# Altium PCB Cat_PCB.PcbDoc
Units mil, origin at the board's own origin, x right, y up, seen from the top; angles counter-clockwise.
Board outline 3550 x 3650 mil, 2 copper layers (Top Layer, Bottom Layer); 21 components, 21 nets, 89 pads, 14 vias.
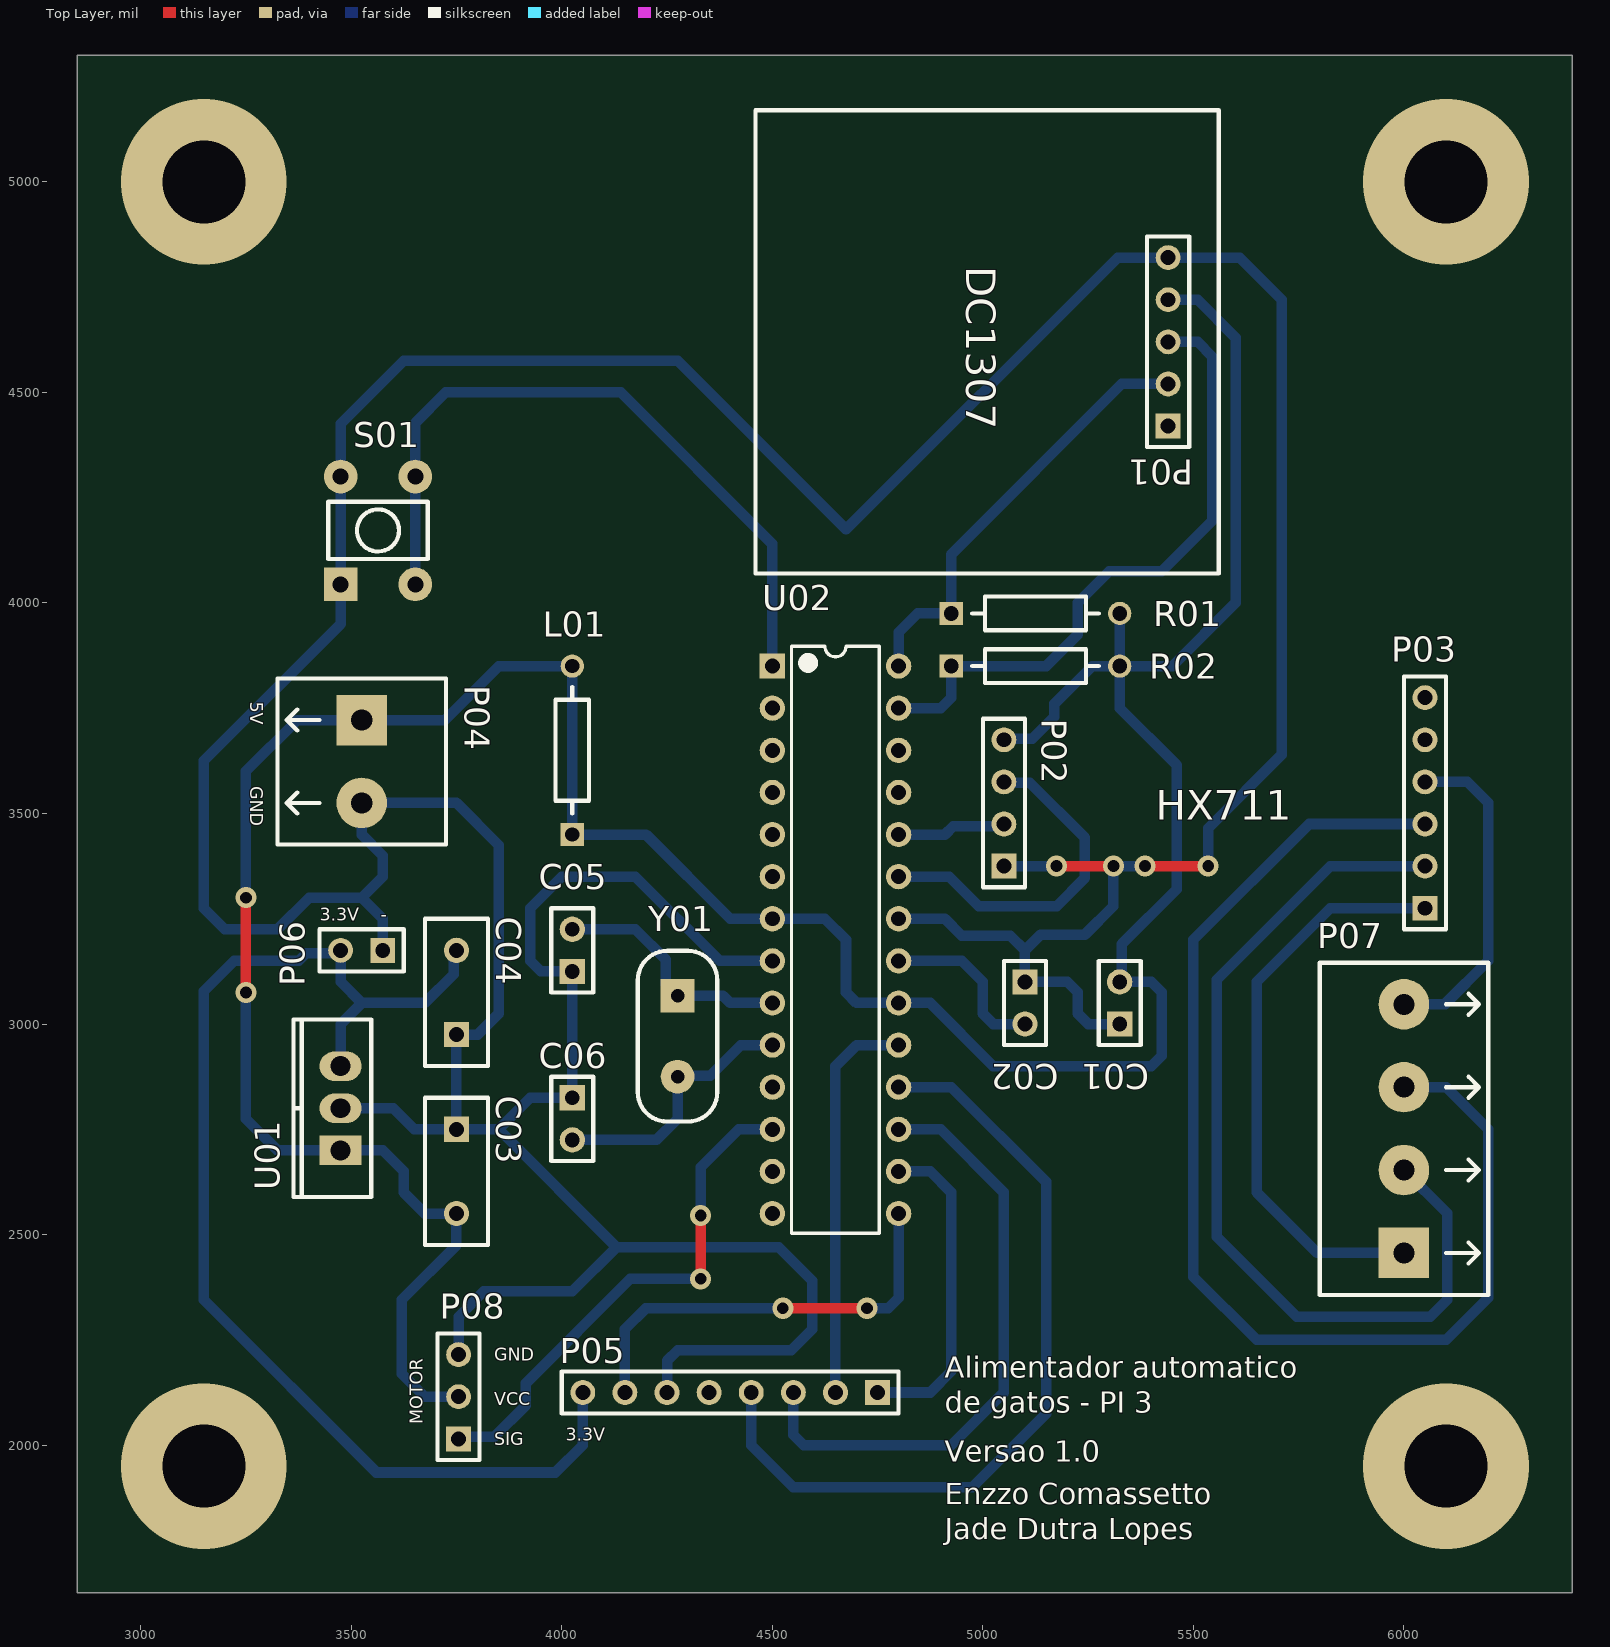
[diagram p0: Top Layer view]
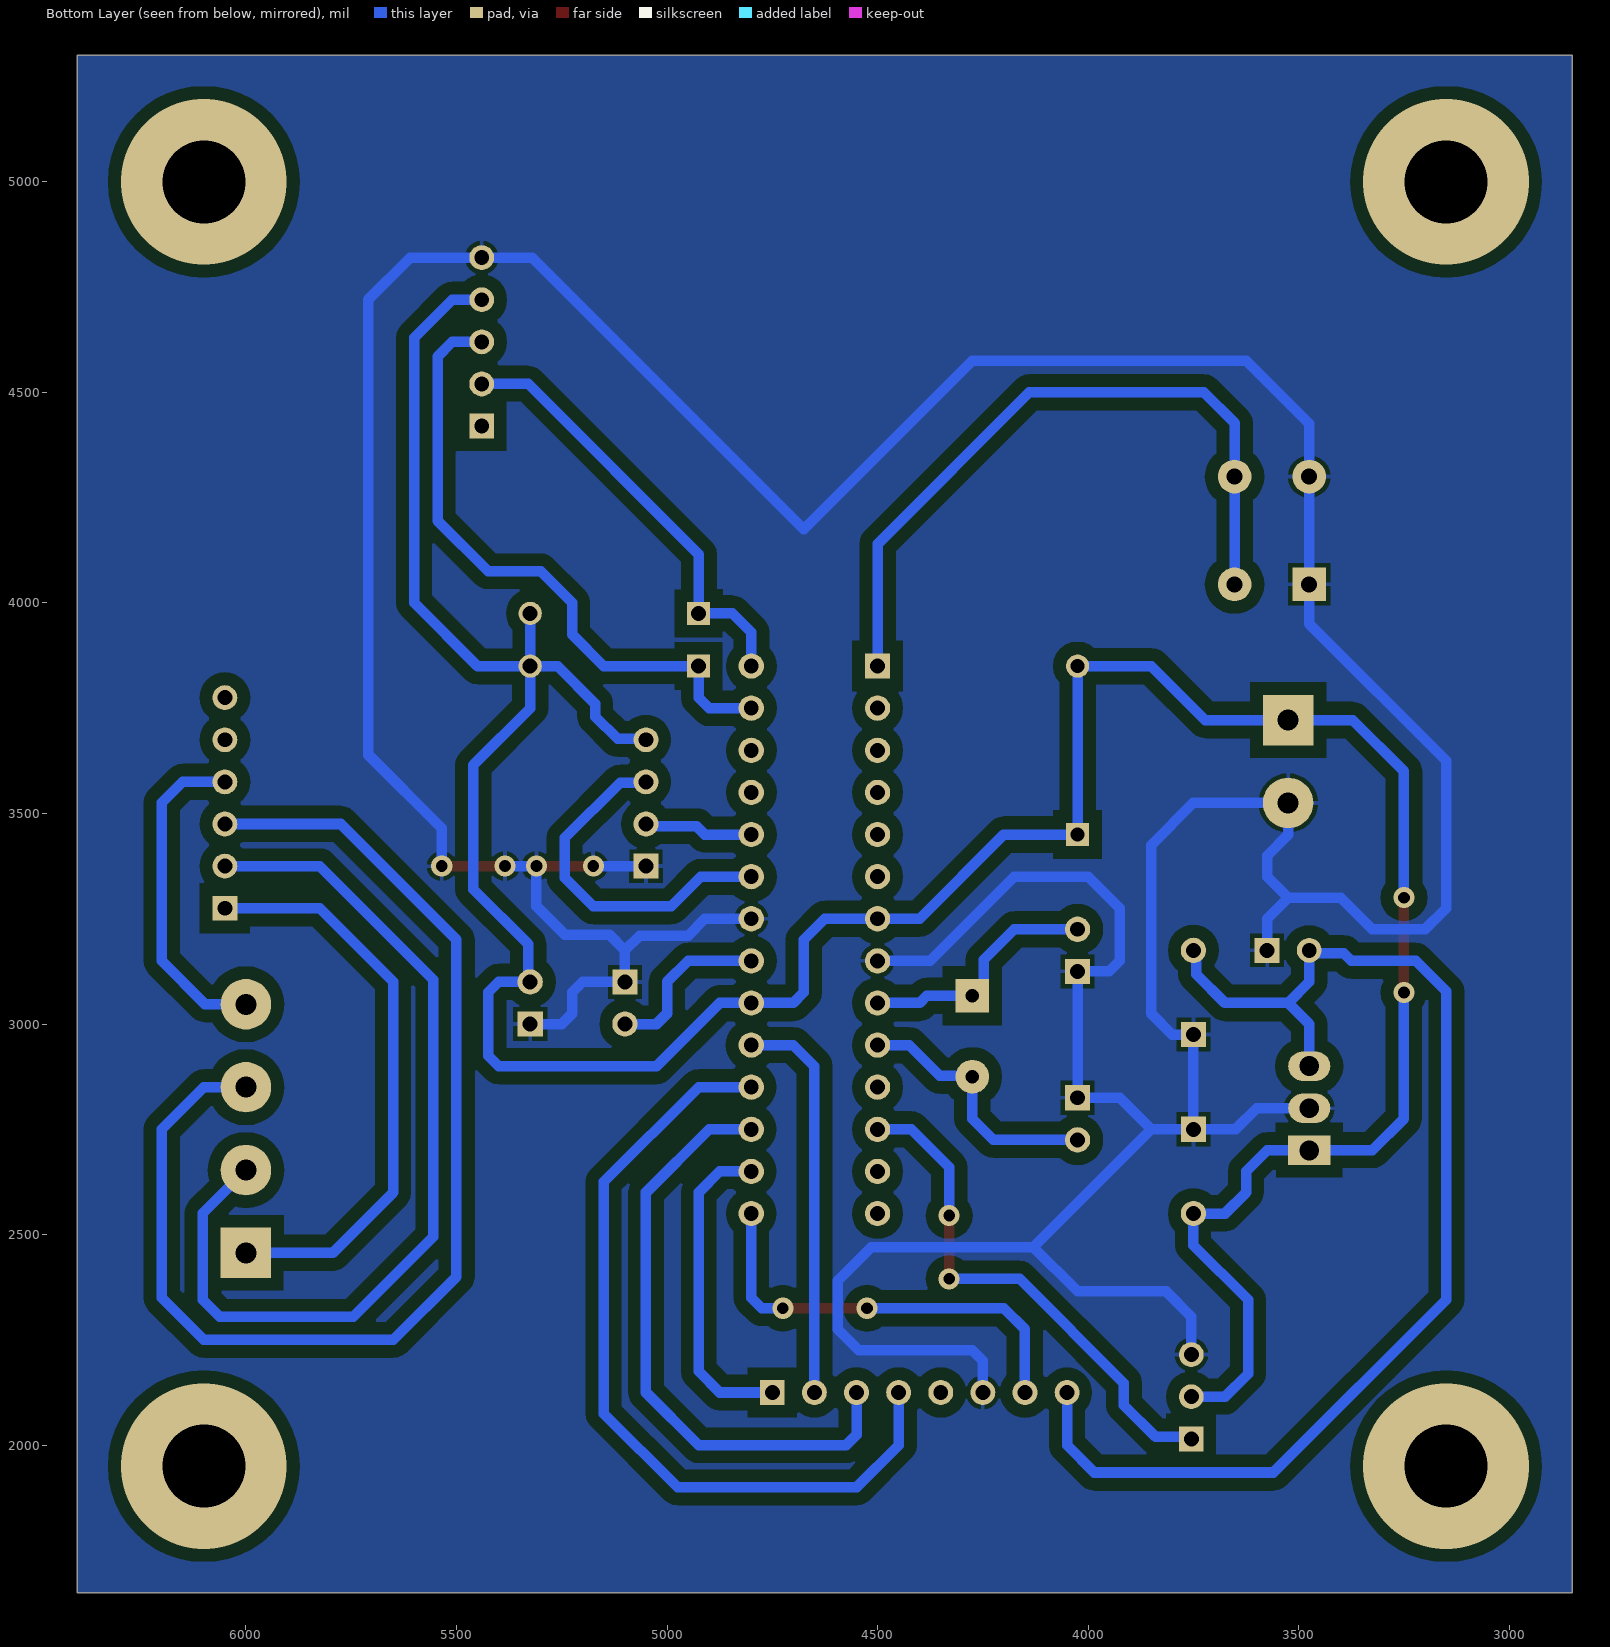
[diagram p1: Bottom Layer view, seen from below]
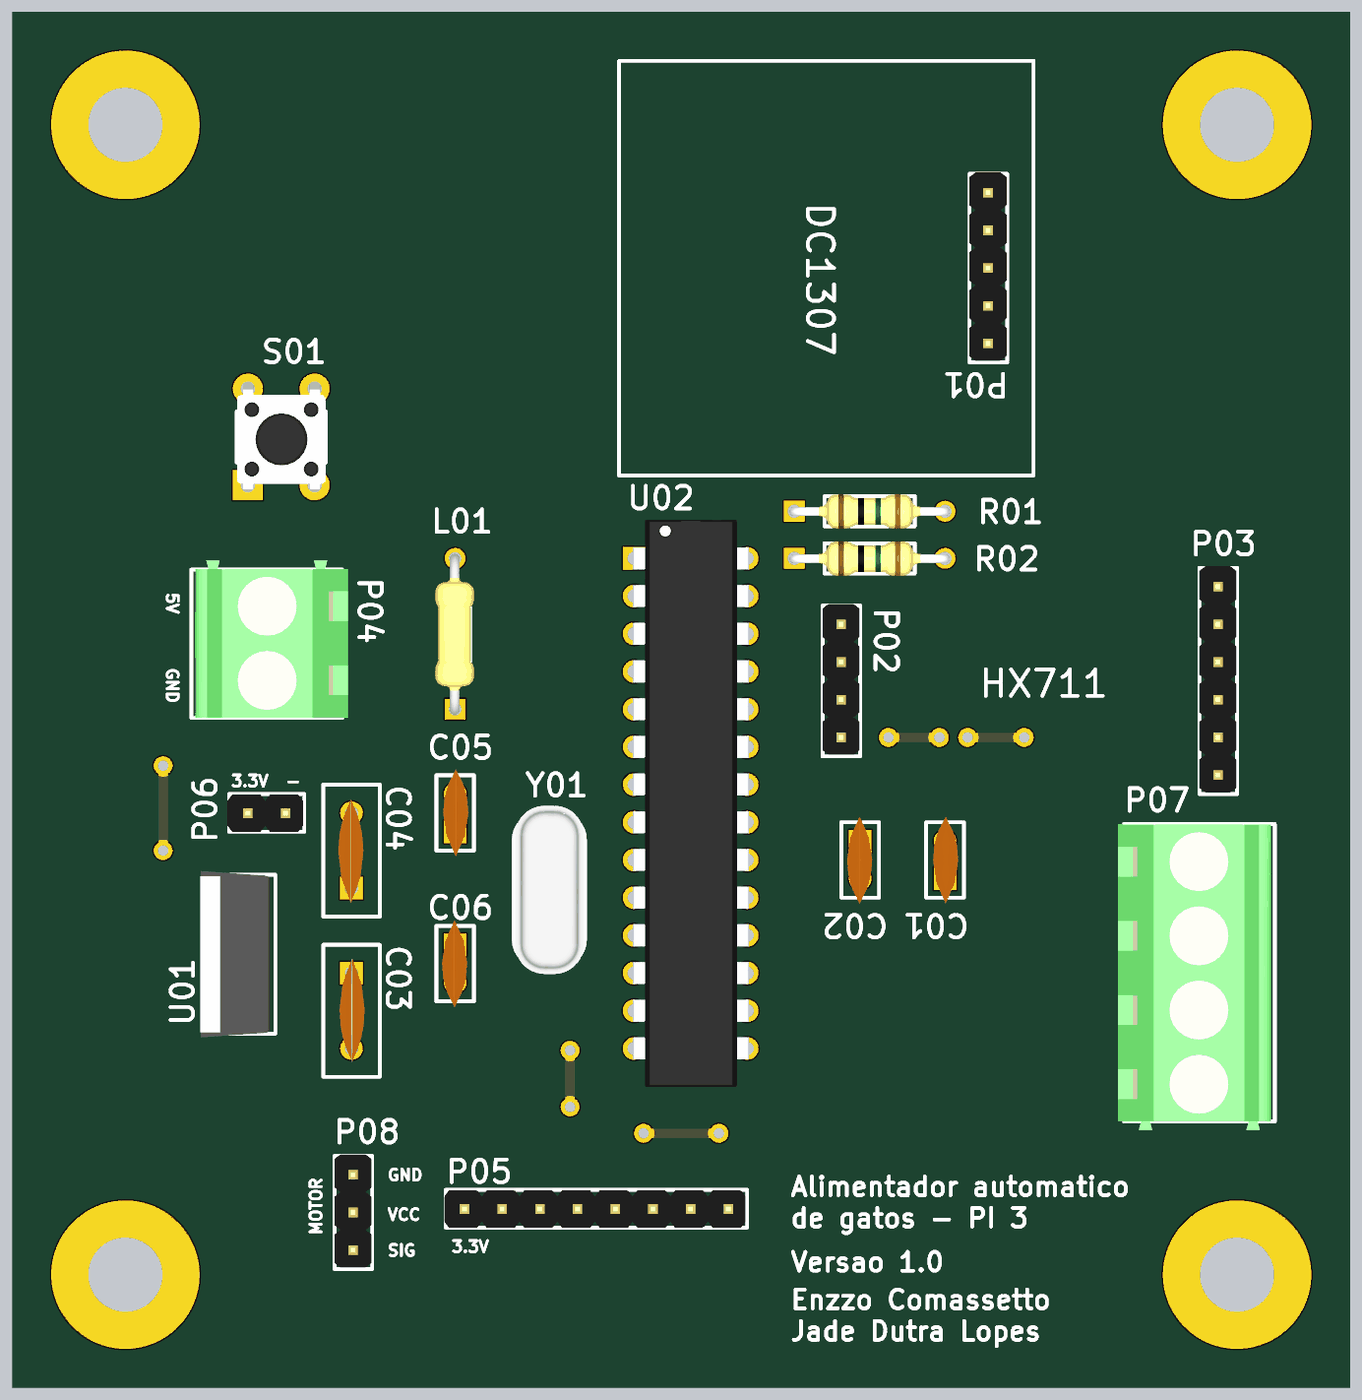
[diagram p2: 3D render of the assembled board from above, using the file's embedded part models]

## Layer stack, top to bottom
Top Solder: solder mask 0.4, Solder Resist, Dk 3.5
Top Layer: signal copper 1.4
Dielectric 1: dielectric 12.6, FR-4, Dk 4.8
Bottom Layer: signal copper 1.4
Bottom Solder: solder mask 0.4, Solder Resist, Dk 3.5

## Board outline
2850,1650 2850,5300 6400,5300 6400,1650 6000,1650

## Design rules (kind name [scope] priority, off if disabled: settings)
Clearance [All] p1: gap=30 ignorepadtopadclearanceinfootprint=FALSE
ComponentClearance [All] p1: gap=10 collisioncheckmode=3 verticalgap=0 showdistances=FALSE
HoleSize [All] p1: absolutevalues=TRUE maxlimit=280 minlimit=1 maxpercent=80.000 minpercent=20.000
HoleToHoleClearance [All] p1: gap=5 allowstackedmicrovias=TRUE
MinimumSolderMaskSliver [All] p1: minsoldermaskwidth=5
PlaneClearance [All] p1: clearance=30
PolygonConnect [All] p1: connectstyle=Relief reliefconductorwidth=10 reliefentries=4 polygonreliefangle="90 Angle" airgapwidth=10
RoutingVias [All] p1: holewidth=28 width=50 viastyle="Through Hole" minholewidth=28 minwidth=50 maxholewidth=280 maxwidth=500
SilkToSilkClearance [All] p1: silktosilkclearance=4
SilkToSolderMaskClearance [IsPad] p1: minsilkscreentomaskgap=5 clearancetoexposedcopper=TRUE
SolderMaskExpansion [All] p1: expansion=4 istentingtop=FALSE
Width [All] p1: maxlimit=60 minlimit=25 preferedwidth=25
23 further rules are at their usual default settings.

## Components (designator, comment, footprint, x,y, rotation, side; value= is the part's Value field where it differs from the comment)
C01 "100nF" C100-200-100 5325,3000 r90 top
C02 "470nF" C100-200-100 5100,3100 r270 top
C03 "0.33uF" C200-350-150 3750,2750 r270 top
C04 "0.1uF" C200-350-150 3750,2975 r90 top
C05 "22pF" C100-200-100 4025,3125 r90 top
C06 "22pF" C100-200-100 4025,2825 r270 top
L01 "10uH" L400-2.0mm 4025,3450 r90 top
P01 "DS1307" HDR-M-1x5-2.54mm-180-9.2mm 5440,4420 r90 top
P02 "HX_IN" HDR-M-1x4-2.54mm-180-21.1mm 5050,3375 r90 top
P03 "HX_OUT" HDR-M-1x6-2.54mm-180-9.2mm 6050,3275 r90 top
P04 "5V" KRE_2 3525,3721.85 r270 top
P05 "RFID" HDR-M-1x8-2.54mm-180-9.2mm 4750,2125 r180 top
P06 "3.3V" HDR-M-1x2-2.54mm-180-9.2mm 3575,3175 r180 top
P07 "HX_OUT" KRE_4 6000,2456.3 r90 top
P08 "Motor" HDR-M-1x3-2.54mm-180-9.2mm 3755,2015 r90 top
R01 "10k" R400-2.0mm 4925,3975 r0 top
R02 "10k" R400-2.0mm 4925,3850 r0 top
S01 "PushButton" DTS-6.0mm-6.0mm-THT 3475,4044.09 r180 top
U01 "LM7833" TO-220/123 3475,2700 r90 top
U02 "ATmega328PA-PU" DIP28-300(100) 4500,3850 r270 top
Y01 "16MHz" HC49-US-THT 4275,2971.06 r270 top

## Footprints (in the part's own frame and the unit in brackets; to place one, negate y for a bottom-side part, rotate by r counter-clockwise, add the part's x,y. Pads: shape width x height; smd on the part's side, far side on the other; paste and mask are expansions set on the pad)
C100-200-100 [mil] "Radial Cap, Thru-Hole; 2 Leads; 0.1 in Pin Spacing"
  rect 60x60 hole 35.43: 1(0,0)
  round 60 hole 35.43: 2(100,0)
  silkscreen extent -50,-50 150,50, body extent -65,-35 165,32, height 245
C200-350-150 [mil] "Radial Cap, Thru-Hole; 2 Leads; 0.2 in Pin Spacing"
  rect 60x60 hole 35.43: 1(0,0)
  round 60 hole 35.43: 2(200,0)
  silkscreen extent -75,-75 275,75, body extent -40,-32 236,35, height 288
DIP28-300(100) [mil] "DIP, 28-Leads, Row Spacing 7.62mm, Pitch 2.54mm, Body 34.67x7.3mm"
  rect 60x60 hole 35.43: 1(0,0)
  round 60 hole 35.43: 2(100,0) 3(200,0) 4(300,0) 5(400,0) 6(500,0) 7(600,0) 8(700,0) 9(800,0) 10(900,0) 11(1000,0) 12(1100,0) 13(1200,0) 14(1300,0) 15(1300,300) 16(1200,300) 17(1100,300) 18(1000,300) 19(900,300) 20(800,300) 21(700,300) 22(600,300) 23(500,300) 24(400,300) 25(300,300) 26(200,300) 27(100,300) 28(0,300)
  silkscreen extent -47,46 1347,254, body extent -102,-4 1402,305, height 171
DTS-6.0mm-6.0mm-THT [mil] "Push Button Switch Through Role 6.0mm x 6.0mm"
  rect 80x80 hole 38: 1(0,0)
  round 80 hole 38: 2(0,-255.91) 3(-177.17,0) 4(-177.17,-255.91)
  silkscreen extent -207,-196 30,-60, body extent -207,-275 29,32, height 197
HC49-US-THT [mil] "THT Quartz Crystal"
  rect 80x80 hole 32: 1(-96.06,0)
  round 80 hole 32: 2(96.06,0)
  silkscreen extent -203,-94 203,94, body extent -223,-91 224,92, height 138
HDR-M-1x2-2.54mm-180-9.2mm [mm] "Male Header, 1 line 2 rows, 180 degrees, 9.2 mm length"
  rect 1.5x1.5 hole 0.9: 1(0,0)
  round 1.5 hole 0.9: 2(2.54,0)
  silkscreen extent -1.27,-1.27 3.81,1.27, body extent -1.17,-1.22 3.91,1.27, height 6.2
HDR-M-1x3-2.54mm-180-9.2mm [mm] "Male Header, 1 line 3 rows, 180 degrees, 9.2 mm length"
  rect 1.5x1.5 hole 0.9: 1(0,0)
  round 1.5 hole 0.9: 2(2.54,0) 3(5.08,0)
  silkscreen extent -1.27,-1.27 6.35,1.27, body extent -1.17,-1.22 6.45,1.27, height 6.2
HDR-M-1x4-2.54mm-180-21.1mm [mm] "Male Header, 1 line 4 rows, 180 degrees, 21.1 mm length"
  rect 1.5x1.5 hole 0.9: 1(0,0)
  round 1.5 hole 0.9: 2(2.54,0) 3(5.08,0) 4(7.62,0)
  silkscreen extent -1.27,-1.27 8.89,1.27, body extent -1.17,-1.22 8.99,1.27, height 15.14
HDR-M-1x5-2.54mm-180-9.2mm [mm] "Male Header, 1 line 5 rows, 180 degrees, 9.2 mm length"
  rect 1.5x1.5 hole 0.9: 1(0,0)
  round 1.5 hole 0.9: 2(2.54,0) 3(5.08,0) 4(7.62,0) 5(10.16,0)
  silkscreen extent -1.27,-1.27 11.43,1.27, body extent -1.17,-1.22 11.53,1.27, height 6.2
HDR-M-1x6-2.54mm-180-9.2mm [mm] "Male Header, 1 line 6 rows, 180 degrees, 9.2 mm length"
  rect 1.5x1.5 hole 0.9: 1(0,0)
  round 1.5 hole 0.9: 2(2.54,0) 3(5.08,0) 4(7.62,0) 5(10.16,0) 6(12.7,0)
  silkscreen extent -1.27,-1.27 13.97,1.27, body extent -1.17,-1.22 14.07,1.27, height 6.2
HDR-M-1x8-2.54mm-180-9.2mm [mm] "Male Header, 1 line 8 rows, 180 degrees, 9.2 mm length"
  rect 1.5x1.5 hole 0.9: 1(0,0)
  round 1.5 hole 0.9: 2(2.54,0) 3(5.08,0) 4(7.62,0) 5(10.16,0) 6(12.7,0) 7(15.24,0) 8(17.78,0)
  silkscreen extent -1.27,-1.27 19.05,1.27, body extent -1.17,-1.22 19.15,1.27, height 6.2
KRE_2 [mil] "Terminal Block 2 pins"
  rect 120x120 hole 50: 1(0,0)
  round 120 hole 50: 2(196.85,0)
  silkscreen extent -98,-200 295,200, body extent -123,-190 294,216, height 559
KRE_4 [mil] "Terminal Block 4 pins"
  rect 120x120 hole 50: 1(0,0)
  round 120 hole 50: 2(196.85,0) 3(393.7,0) 4(590.55,0)
  silkscreen extent -100,-200 689,200, body extent -123,-190 688,216, height 559
L400-2.0mm [mm] "Axial Device, Thru-Hole; 2 Leads; 0.4 in Pin Spacing"
  rect 1.4x1.4 hole 0.85: 1(0,0)
  round 1.4 hole 0.85: 2(10.16,0)
  silkscreen extent 1.27,-1.02 8.89,1.02, body extent -0.36,-1.27 10.46,1.33, height 3.5
R400-2.0mm [mm] "Axial Device, Thru-Hole; 2 Leads; 0.4 in Pin Spacing"
  rect 1.4x1.4 hole 0.9: 1(0,0)
  round 1.4 hole 0.9: 2(10.16,0)
  silkscreen extent 1.27,-1.02 8.89,1.02, body extent -0.3,-1.17 10.46,1.14, height 2.93
TO-220/123 [mil] "TO, Thru-Hole, Vertical, Heatsink Mounted; 3 In-Line Leads; Pitch 2.54 mm"
  rect 70x100 hole 47.24: 1(0,0)
  oval 70x100 hole 47.24: 2(100,0) 3(200,0)
  silkscreen extent -111,-73 311,112, body extent -121,-59 321,126, height 832

## Part data
C01 C02 C03 C04 C05 C06: library part Capacitor, "Capacitor", Voltage="100 V", LatestRevisionDate=17-Jul-2002, LatestRevisionNote="Re-released for DXP Platform.", PackageReference=RAD-0.3, Published=8-Jun-2000, Publisher="Altium Limited"
L01: library part Inductor, "Inductor"
P01: library part Header_1x5, "Header, 1 Line, 5 Columns, 5 Pins", LatestRevisionDate=17-Jul-2002, LatestRevisionNote="Re-released for DXP Platform.", Publisher="Altium Limited"
P02: library part Header_1x4, "Header, 1 Line, 4 Columns, 4 Pins", LatestRevisionDate=17-Jul-2002, LatestRevisionNote="Re-released for DXP Platform.", Publisher="Altium Limited"
P03: library part Header_1x6, "Header, 1 Line, 6 Columns, 6 Pins", LatestRevisionDate=17-Jul-2002, LatestRevisionNote="Re-released for DXP Platform.", Publisher="Altium Limited"
P04: library part KRE_2, "Terminal Block 1x2"
P05: library part Header_1x8, "Header, 1 Line, 8 Columns, 8 Pins", LatestRevisionDate=17-Jul-2002, LatestRevisionNote="Re-released for DXP Platform.", Publisher="Altium Limited"
P06: library part Header_1x2, "Header, 1 Line, 2 Columns, 2 Pins", LatestRevisionDate=17-Jul-2002, LatestRevisionNote="Re-released for DXP Platform.", Publisher="Altium Limited"
P07: library part KRE_4, "Terminal Block 1x4"
P08: library part Header_1x3, "Header, 1 Line, 3 Columns, 3 Pins", LatestRevisionDate=17-Jul-2002, LatestRevisionNote="Re-released for DXP Platform.", Publisher="Altium Limited"
R01 R02: library part Resistor, "Resistor", Power="1/4 W", Tolerance=5%, LatestRevisionDate=17-Jul-2002, LatestRevisionNote="Re-released for DXP Platform.", PackageReference=AXIAL-0.3, Published=8-Jun-2000, Publisher="Altium Limited"
S01: library part PushButton_4, "Tactile Switch SPST 4 pins"
U01: library part LM7805CT, "3-Terminal 1 A Positive 5 V Voltage Regulator"
U02: "8-bit AVR Microcontroller with 32 KB In-System Programmable Flash", Clock Frequency="0 - 20 MHz", Supply Voltage (Vdd)="1.8 - 5.5 V", ADC Channel=6, Analog Comparator=1, Debug=debugWire, EEPROM Memory="1 KB", Flash Memory="32 KB", I/O Pins=23, PWM Channel=6, Serial I2C=1, Serial SPI=1, Serial USART=1, SRAM Memory="2 KB", Timer 8 bits=2, Timer 16 bits=1
Y01: library part Crystal, "Crystal"

## Via types
v1: diameter 50, hole 28, Top Layer to Bottom Layer, 10 vias
v2: diameter 393.7, hole 196.85, Top Layer to Bottom Layer, 4 vias

## Nets (pads, with @x,y where several pads share a name; then routed paths per layer and width w, separated by ;. In a path a pad name is that pad's centre, name@x,y a point inside that pad or via, vN(x,y) a via of type N, cw(c..) or ccw(c..) an arc to the next point about the centre after c; other vN are vias at no path point)
3.3V: C04.2 P05.8 P06.2 U01.3 | length 2942.3
  Bottom Layer w25: U01.3 3475,3000 3525,3050 ; C04.2 3743.3,3168.3 3743.3,3118.3 3675,3050 3525,3050 ; P05.8 4050,2000 3985,1935 3560,1935 3150,2345 3150,3077.78 3222.22,3150 3375,3150 3393.48,3168.48 3468.48,3168.48 P06.2 3475,3100 3525,3050
DT: P02.2 U02.24 | length 260.4
  Bottom Layer w25: U02.24 4910,3450 4930,3470 5045,3470 P02.2
GND: C01.1 C02.1 C03.1 C04.1 C05.1 C06.1 P01.5 P02.1 P04.2 P05.6 P06.1 P08.3 S01.1 S01.2 U01.2 U02.8 U02.22 | length 12797.7
  Top Layer w25: v1(5175,3375) v1(5310,3375) ; v1(5385,3375) 5385,3380 5390,3375 v1(5535,3375)
  Bottom Layer w25: U01.2 3600,2800 3650,2750 C03.1 ; P06.1 3575,3250 3525,3300 ; P08.3 3760,2220 3755,2225 3755,2305 3815,2365 4025,2365 4130,2470 ; P05.6 4250,2200 4275,2225 4545,2225 4595,2275 4595,2390 4515,2470 4130,2470 ; U02.8 4375,3150 4175,3350 4000,3350 3925,3275 3925,3150 3950,3125 C05.1 C06.1 3925,2825 3850,2750 ; U02.22 4910,3250 4950,3210 5065,3210 5100,3175 ; P02.1 5050,3380 5055,3375 v1(5175,3375) ; C01.1 5250,3000 5225,3025 5225,3075 5200,3100 C02.1 5100,3175 ; v1(5385,3375) v1(5310,3375) 5310,3280 5242.5,3212.5 5137.5,3212.5 5100,3175 ; v1(5535,3375) 5535,3465 5710,3640 5710,4720 5610,4820 P01.5 5320,4820 4675,4175 4275,4575 3625,4575 3475,4425 S01.2 S01.1 3475,3950 3150,3625 3150,3275 3200,3225 3325,3225 3400,3300 3525,3300 ; 3525,3300 3575,3350 3575,3400 3525,3450 P04.2 3750,3525 3850,3425 3850,3025 3800,2975 C04.1 C03.1 ; C03.1 3850,2750 ; 3850,2750 4130,2470
HX_SCK: P02.3 U02.23 | length 841.8
  Bottom Layer w25: U02.23 4920,3350 4990,3280 5175.46,3280 5242.5,3347.04 5242.5,3441.94 5111.46,3572.97 5052.03,3572.97 P02.3
MISO: P05.4 U02.18 | length 1932.1
  Bottom Layer w25: P05.4 4450,2000 4550,1900 4975,1900 5150,2075 5150,2625 4925,2850 U02.18
MOSI: P05.3 U02.17 | length 1449.3
  Bottom Layer w25: P05.3 4550,2025 4575,2000 4925,2000 5050,2125 5050,2600 4900,2750 U02.17
MOTOR: P08.1 U02.12 | length 1235.3
  Top Layer w25: v1(4330,2395) v1(4330,2545)
  Bottom Layer w25: P08.1 3760,2020 3840,2020 3915,2095 3915,2147.22 4162.78,2395 v1(4330,2395) ; v1(4330,2545) 4330,2660 4420,2750 U02.12
NetC02_2: C02.2 U02.21 | length 406.1
  Bottom Layer w25: U02.21 4950,3150 5000,3100 5000,3025 5025,3000 C02.2
NetP03_1: P03.1 P07.1 | length 1382
  Bottom Layer w25: P07.1 5793.7,2456.3 5650,2600 5650,3100 5825,3275 P03.1
NetP03_2: P03.2 P07.2 | length 2210.3
  Bottom Layer w25: P07.2 6102.5,2550.65 6102.5,2344.93 6062.57,2305 5745,2305 5555,2495 5555,3105 5825,3375 P03.2
NetP03_3: P03.3 P07.3 | length 2908.9
  Bottom Layer w25: P07.3 6100,2850 6200,2750 6200,2350 6100,2250 5650,2250 5500,2400 5500,3200 5775,3475 P03.3
NetP03_4: P03.4 P07.4 | length 788.4
  Bottom Layer w25: P07.4 6000.65,3047.5 6097.5,3047.5 6200,3150 6200,3525 6150,3575 P03.4
NetS01_3: S01.3 S01.4 U02.1 | length 1700.2
  Bottom Layer w25: S01.3 S01.4 3652.17,4427.17 3725,4500 4140,4500 4500,4140 U02.1
RST: P05.7 U02.15 | length 1031.1
  Top Layer w25: v1(4525,2325) v1(4725,2325)
  Bottom Layer w25: P05.7 4150,2275 4200,2325 v1(4525,2325) ; v1(4725,2325) 4775,2325 4800,2350 U02.15
SCK: P05.2 U02.19 | length 945.7
  Bottom Layer w25: P05.2 4650,2900 4700,2950 U02.19
SCL: P01.2 R01.1 U02.28 | length 1046.4
  Bottom Layer w25: U02.28 4800,3930 4845,3975 R01.1 4925,4115 5330,4520 P01.2
SDA: P01.3 R02.1 U02.27 | length 1526.7
  Bottom Layer w25: U02.27 4900,3750 4925,3775 R02.1 5150,3850 5225,3925 5225,4000 5300,4075 5425,4075 5545,4195 5545,4585 5510,4620 P01.3
SS: P05.1 U02.16 | length 766.4
  Bottom Layer w25: P05.1 4875,2125 4925,2175 4925,2600 4875,2650 U02.16
VCC: C01.2 C03.2 L01.1 L01.2 P01.4 P02.4 P04.1 P08.2 R01.2 R02.2 U01.1 U02.7 U02.20 | length 7824.9
  Top Layer w25: v1(3250,3075) v1(3250,3300)
  Bottom Layer w25: v1(3250,3075) 3250,2775 3325,2700 U01.1 3575,2700 3625,2650 3625,2600 3675,2550 C03.2 3750,2475 3620,2345 3620,2170 3675,2115 P08.2 ; v1(3250,3300) 3250,3600 3371.85,3721.85 P04.1 3721.85,3721.85 3850,3850 L01.2 L01.1 4200,3450 4400,3250 U02.7 4625,3250 4675,3200 4675,3075 4700,3050 U02.20 4875,3050 5025,2900 5400,2900 5425,2925 5425,3075 5400,3100 C01.2 5330,3105 5330,3190 5460,3320 5460,3615 5325,3750 R02.2 ; P02.4@5050,3680 P02.4 5052.03,3677.03 5117.03,3677.03 5170,3730 5170,3760 5259.94,3849.94 5324.94,3849.94 R02.2 ; R01.2 R02.2 ; P01.4 5440,4730 5450,4720 5510,4720 5600,4630 5600,4000 5450,3850 R02.2
XTAL1: C05.2 U02.9 Y01.1 | length 581.4
  Bottom Layer w25: C05.2 4175,3225 4247.5,3152.5 4247.5,3094.63 Y01.1 4382.87,3067.13 4400,3050 U02.9
XTAL2: C06.2 U02.10 Y01.2 | length 626.8
  Bottom Layer w25: C06.2 4225,2725 4275,2775 Y01.2 4277.5,2877.5 4352.5,2877.5 4425,2950 U02.10
pads on no net: P01.1 P03.5 P03.6 P05.5 U02.2 U02.3 U02.4 U02.5 U02.6 U02.11 U02.13 U02.14 U02.25 U02.26
copper on no net:
  other v2: 3150,1950 6100,1950 3150,5000 6100,5000

## Polygon pours and split planes (outlines as drawn)
GND on Bottom Layer "GND_L02_P000" (solid, pour order 0): 2850,5300 6400,5300 6400,1650 2850,1650

## Silkscreen, mask and mechanical layers (free items; w line width, h text height)
Top Overlay:
  lines w10: 4460,4070 5560,4070 5560,5170 4460,5170 4460,4070
  text "DC1307" at 4960,4800 h70 r270
  text "5V" at 3260,3765 h30 r270
  text "GND" at 3260,3565 h30 r270
  text "HX711" at 5410,3485 h70
  text "3.3V" at 3425,3245 h30
  text "-" at 3570,3245 h30
  text "GND" at 3840,2200 h30
  text "Alimentador automatico" at 4910,2160 h50
  text "VCC" at 3840,2095 h30
  text "de gatos - PI 3" at 4910,2076.66 h50
  text "MOTOR" at 3670,2050 h30 r90
  text "3.3V" at 4010,2010 h30
  text "SIG" at 3840,2000 h30
  text "Versao 1.0" at 4910,1960 h50
  text "Enzzo Comassetto" at 4910,1860 h50
  text "Jade Dutra Lopes" at 4910,1776.66 h50
Mechanical 1:
  the board outline again, w25